# Altium PCB InfoDisplayPreReRoute.PcbDoc (part 1 of 2)
Units mil, origin at the board's own origin, x right, y up, seen from the top; angles counter-clockwise.
Board outline 4606.3 x 1732.28 mil, 2 copper layers (Top Layer, Bottom Layer), stack 65.792 mil thick; 218 components, 174 nets, 682 pads, 190 vias.
Unrouted connection lines stored in the file: 55.
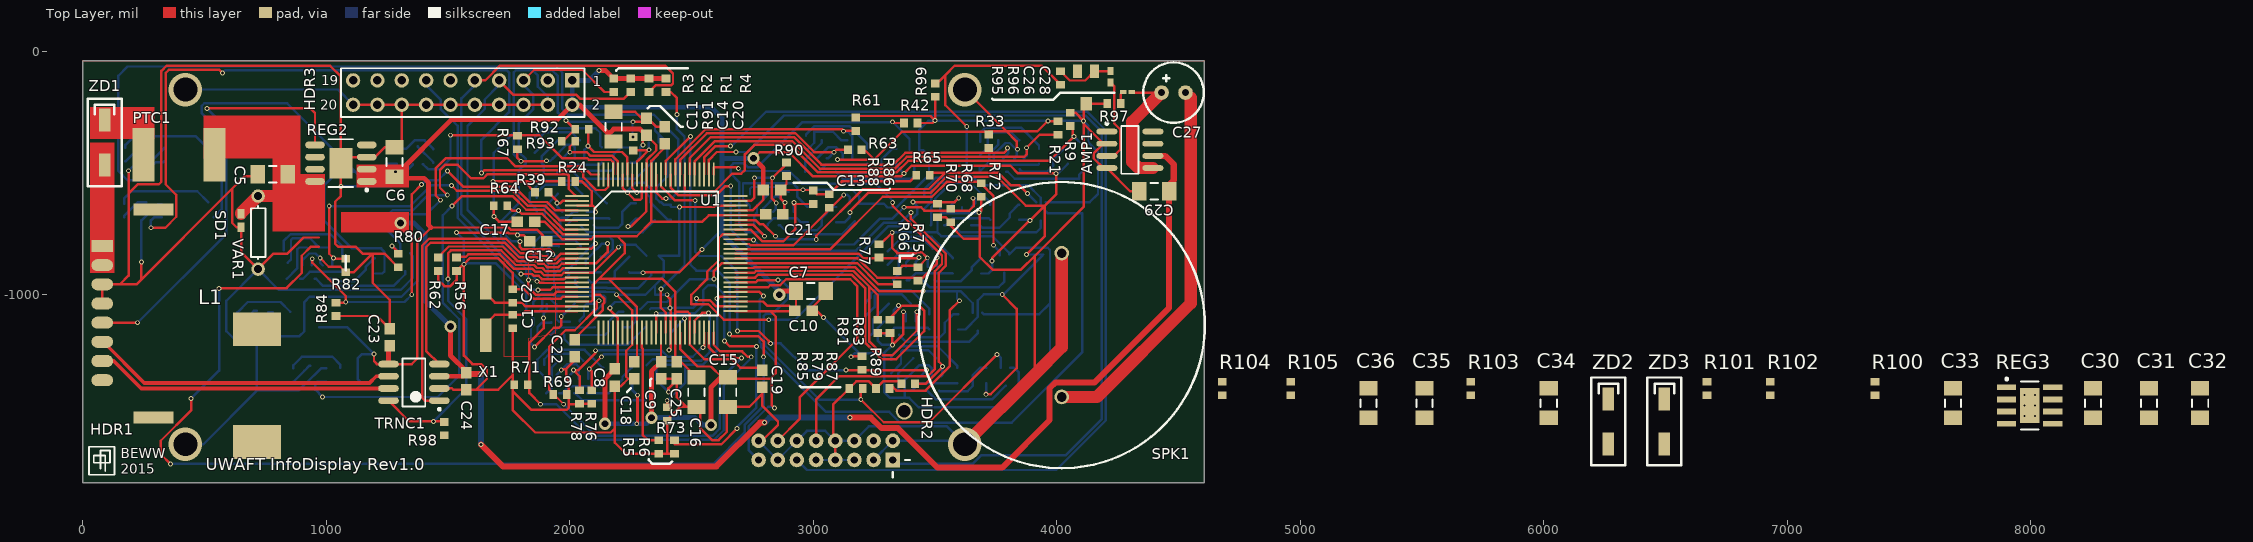
[diagram p0: Top Layer view]
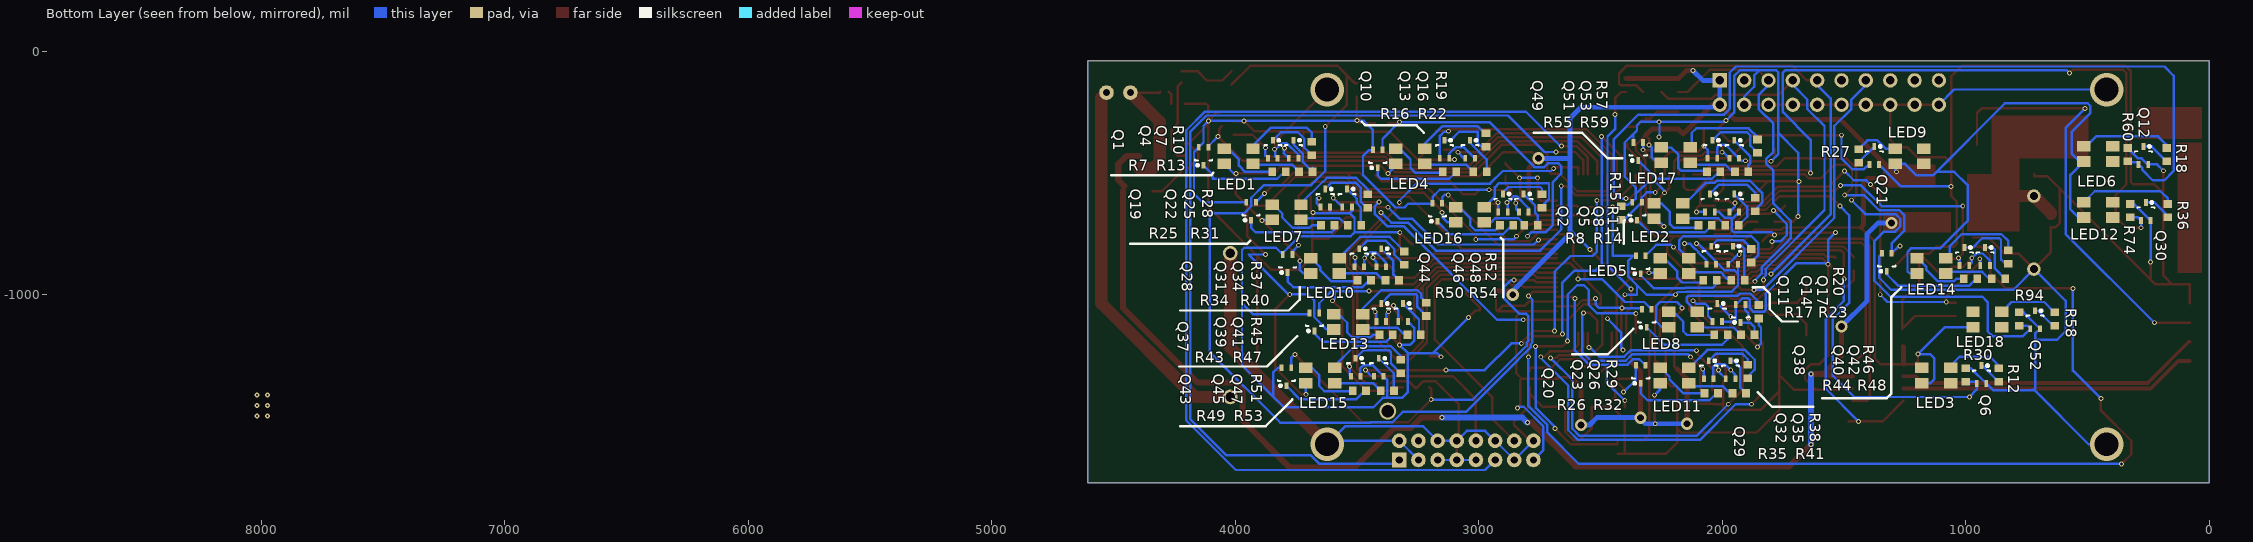
[diagram p1: Bottom Layer view, seen from below]

## Layer stack, top to bottom
Top Solder: solder mask 0.4, Solder Resist, Dk 3.5
Top Layer: signal copper 1.4
Dielectric 1: dielectric 62.9921, FR-4, Dk 4.8
Bottom Layer: signal copper 1.4
Bottom Solder: solder mask 0.4, Solder Resist, Dk 3.5

## Board outline
0,-39.37 4606.3,-39.37 4606.3,-1771.65 0,-1771.65

## Design rules (kind name [scope] priority, off if disabled: settings)
Clearance [All] p1: gap=6
DiffPairsRouting [All] p1: maxlimit=10 minlimit=10 mostfreqgap=10 toplayer_minwidth=15 toplayer_maxwidth=15 toplayer_prefwidth=15 bottomlayer_minwidth=15 bottomlayer_maxwidth=15 bottomlayer_prefwidth=15 maxuncoupledlength=500
MinimumSolderMaskSliver MinimumSolderMaskSliver_SAM [HasFootprint('100-LQFP')] p1: minsoldermaskwidth=3
MinimumSolderMaskSliver [All] p2: minsoldermaskwidth=4
PolygonConnect [All] p1: connectstyle=Direct reliefconductorwidth=10 reliefentries=4 polygonreliefangle="90 Angle" airgapwidth=10
RoutingVias [All] p1: holewidth=10 width=20 viastyle="Through Hole" minholewidth=12 minwidth=20 maxholewidth=500 maxwidth=450
SilkToSilkClearance [All and not HasFootprint('SOT50P160X110-3N')] p1: silktosilkclearance=4
SilkToSolderMaskClearance [IsPad and not HasFootprint('SOT50P160X110-3N')] p1: minsilkscreentomaskgap=4 clearancetoexposedcopper=TRUE
SolderMaskExpansion [All] p1: expansion=4
Width [All] p1: maxlimit=100 minlimit=10 preferedwidth=10
25 further rules are at their usual default settings.

## Classes and differential pairs
component class InfoDisplayAudio: AMP1 C26 C27 C28 C29 R95 R96 R97 SPK1
component class InfoDisplayLEDs: LED1 LED2 LED3 LED4 LED5 LED6 LED7 LED8 LED9 LED10 LED11 LED12 LED13 LED14 LED15 LED16 LED17 LED18 Q1 Q2 Q4 Q5 Q6 Q7 Q8 Q10 Q11 Q12 Q13 Q14 Q16 Q17 Q19 Q20 Q21 Q22 Q23 Q25 Q26 Q28 Q29 Q30 Q31 Q32 Q34 Q35 Q37 Q38 Q39 Q40 Q41 Q42 Q43 Q44 Q45 Q46 Q47 Q48 Q49 Q51 Q52 Q53 R7 R8 R9 R10 R11 R12 R13 R14 R15 R16 R17 R18 R19 R20 R21 R22 R23 R24 R25 R26 R27 R28 R29 R30 R31 R32 R33 R34 R35 R36 R37 R38 R39 R40 R41 R42 R43 R44 R45 R46 R47 R48 R49 R50 R51 R52 R53 R54 R55 R56 R57 R58 R59 R60 R61 R62 R63 R64 R65 R66 R67 R68 R69 R70 R71 R72 R73 R74 R75 R76 R77 R78 R79 R80 R81 R82 R83 R84 R85 R86 R87 R88 R89 R90 R91 R92 R93 R94
component class InfoDisplay: C1 C2 C7 C8 C9 C10 C11 C12 C13 C14 C15 C16 C17 C18 C19 C20 C21 C22 C23 C24 C25 HDR1 HDR2 HDR3 R1 R2 R3 R4 R5 R6 R98 R99 TRNC1 U1 X1
component class InfoDisplayPower: C5 C6 C30 C31 C32 C33 C34 C35 C36 L1 PTC1 R100 R101 R102 R103 R104 R105 REG2 REG3 SD1 VAR1 ZD1 ZD2 ZD3
differential pair CAR_CAN: +CAR_CAN_P -CAR_CAN_N

## Components (designator, comment, footprint, x,y, rotation, side; value= is the part's Value field where it differs from the comment)
AMP1 "LM386MX" SOIC127P600X173-8N 4300,-405 r0 top
C1 "CL10C300FB8NNNC" 1608[0603] 1765,-1110 r90 top
C2 "Cap" 1608[0603] 1765,-1005 r270 top
C5 "CGA5L1X7R1E106K160AC" CAPC3216M 780,-505 r0 top
C6 "CGA5L1X7R1E106K160AC" CAPC3216M 1280,-455 r90 top
C7 "Cap Pol1" CAPC3216M 2990,-985 r0 top
C8 "Cap" CAPC1608M 2185,-1340 r270 top
C9 "Cap" CAPC1608M 2375,-1310 r270 top
C10 "Cap" CAPC1608M 2960,-1065 r0 top
C11 "Cap Pol1" CAPC3216M 2180,-310 r90 top
C12 "Cap" CAPC1608M 1870,-780 r180 top
C13 "Cap" CAPC1608M 2830,-570 r0 top
C14 "Cap" CAPC1608M 2315,-310 r90 top
C15 "Cap Pol1" CAPC3216M 2650,-1400 r270 top
C16 "Cap Pol1" CAPC3216M 2520,-1400 r270 top
C17 "Cap" CAPC1608M 1820,-700 r180 top
C18 "Cap" CAPC1608M 2265,-1310 r270 top
C19 "Cap" CAPC1608M 2790,-1345 r270 top
C20 "Cap" CAPC1608M 2390,-345 r90 top
C21 "Cap" CAPC1608M 2840,-670 r0 top
C22 "Cap" CAPC1608M 2020,-1220 r270 top
C23 "Cap" CAPC1608M 1260,-1175 r270 top
C24 "Cap" CAPC1608M 1575,-1355 r270 top
C25 "Cap" CAPC1608M 2440,-1310 r270 top
C26 "GRM155R60J105KE19D" CAPC1005N 4220,-105 r270 top
C27 "EEU-FR1A271" EEU-FR1A271 4430,-170 r0 top
C28 "GRM033R61E472KA12D" RESC0603N 4290,-167.28 r0 top
C29 "F930J107MAA" CAPC3216M 4400,-575 r180 top
C30 "CGA5L1X7R1E106K160AC" CAPC3216M 8255,-1445 r90 top
C31 "CGA5L1X7R1E106K160AC" CAPC3216M 8485,-1445 r90 top
C32 "CGA5L1X7R1E106K160AC" CAPC3216M 8695,-1445 r90 top
C33 "CGA5L1X7R1E106K160AC" CAPC3216M 7680,-1445 r90 top
C34 "CGA5L1X7R1E106K160AC" CAPC3216M 6020,-1445 r90 top
C35 "CGA5L1X7R1E106K160AC" CAPC3216M 5510,-1445 r90 top
C36 "CGA5L1X7R1E106K160AC" CAPC3216M 5280,-1445 r90 top
HDR1 "Vehicle" Molex_DuraClick_8Pin_Vertical 80,-800 r270 top
HDR2 "Display" Molex_iGrid_16Pin_Vertical_Alt 3090,-1600 r180 top
HDR3 "JTAG" HDR2X10 2010,-120 r180 top
L1 "SRP1265A-220M" SRP1265A-220M 715,-1605 r90 top
LED1 "LED" CLVBA-FKA-CAEDH8BBB7A363CT-ND 4045,-400 r180 bottom
LED2 "LED" CLVBA-FKA-CAEDH8BBB7A363CT-ND 2280,-625 r180 bottom
LED3 "LED" CLVBA-FKA-CAEDH8BBB7A363CT-ND 1180,-1300 r180 bottom
LED4 "LED" CLVBA-FKA-CAEDH8BBB7A363CT-ND 3340,-400 r180 bottom
LED5 "LED" CLVBA-FKA-CAEDH8BBB7A363CT-ND 2255,-850 r180 bottom
LED6 "LED" CLVBA-FKA-CAEDH8BBB7A363CT-ND 515,-390 r180 bottom
LED7 "LED" CLVBA-FKA-CAEDH8BBB7A363CT-ND 3847.94,-629.94 r180 bottom
LED8 "LED" CLVBA-FKA-CAEDH8BBB7A363CT-ND 2220,-1070 r180 bottom
LED9 "LED" CLVBA-FKA-CAEDH8BBB7A363CT-ND 1290,-400 r180 bottom
LED10 "LED" CLVBA-FKA-CAEDH8BBB7A363CT-ND 3690,-850 r180 bottom
LED11 "LED" CLVBA-FKA-CAEDH8BBB7A363CT-ND 2255,-1300 r180 bottom
LED12 "LED" CLVBA-FKA-CAEDH8BBB7A363CT-ND 515,-620 r180 bottom
LED13 "LED" CLVBA-FKA-CAEDH8BBB7A363CT-ND 3595,-1080 r180 bottom
LED14 "LED" CLVBA-FKA-CAEDH8BBB7A363CT-ND 1200,-850 r180 bottom
LED15 "LED" CLVBA-FKA-CAEDH8BBB7A363CT-ND 3710,-1300 r180 bottom
LED16 "LED" CLVBA-FKA-CAEDH8BBB7A363CT-ND 3095,-640 r180 bottom
LED17 "LED" CLVBA-FKA-CAEDH8BBB7A363CT-ND 2250,-395.43 r180 bottom
LED18 "LED" CLVBA-FKA-CAEDH8BBB7A363CT-ND 970,-1070 r180 bottom
PTC1 "0ZCF0200AF2C" 0ZCF0200AF2C 250,-425 r0 top
Q1 "MOSFET-N" SOT50P160X110-3N 4110,-395 r270 bottom
Q2 "MOSFET-N" SOT50P160X110-3N 2330,-620 r270 bottom
Q4 "MOSFET-N" SOT50P160X110-3N 3865,-440 r90 bottom
Q5 "MOSFET-N" SOT50P160X110-3N 2070,-660 r90 bottom
Q6 "MOSFET-N" SOT50P160X110-3N 955,-1365 r90 bottom
Q7 "MOSFET-N" SOT50P160X110-3N 3780,-440 r90 bottom
Q8 "MOSFET-N" SOT50P160X110-3N 1970,-660 r90 bottom
Q10 "MOSFET-N" SOT50P160X110-3N 3395,-405 r270 bottom
Q11 "MOSFET-N" SOT50P160X110-3N 2315,-840 r270 bottom
Q12 "MOSFET-N" SOT50P160X110-3N 290,-465 r90 bottom
Q13 "MOSFET-N" SOT50P160X110-3N 3160,-440 r90 bottom
Q14 "MOSFET-N" SOT50P160X110-3N 2065,-875 r90 bottom
Q16 "MOSFET-N" SOT50P160X110-3N 3055,-440 r90 bottom
Q17 "MOSFET-N" SOT50P160X110-3N 1975,-875 r90 bottom
Q19 "MOSFET-N" SOT50P160X110-3N 3915,-620 r270 bottom
Q20 "MOSFET-N" SOT50P160X110-3N 2290,-1060 r270 bottom
Q21 "MOSFET-N" SOT50P160X110-3N 1395,-465 r90 bottom
Q22 "MOSFET-N" SOT50P160X110-3N 3650,-640 r90 bottom
Q23 "MOSFET-N" SOT50P160X110-3N 2040,-1110 r90 bottom
Q25 "MOSFET-N" SOT50P160X110-3N 3560,-640 r90 bottom
Q26 "MOSFET-N" SOT50P160X110-3N 1905,-1040 r270 bottom
Q28 "MOSFET-N" SOT50P160X110-3N 3765,-835 r270 bottom
Q29 "MOSFET-N" SOT50P160X110-3N 2315,-1290 r270 bottom
Q30 "MOSFET-N" SOT50P160X110-3N 280,-695 r90 bottom
Q31 "MOSFET-N" SOT50P160X110-3N 3510,-885 r90 bottom
Q32 "MOSFET-N" SOT50P160X110-3N 2075,-1345 r90 bottom
Q34 "MOSFET-N" SOT50P160X110-3N 3420,-885 r90 bottom
Q35 "MOSFET-N" SOT50P160X110-3N 1985.3,-1345 r90 bottom
Q37 "MOSFET-N" SOT50P160X110-3N 3655,-1075 r270 bottom
Q38 "MOSFET-N" SOT50P160X110-3N 1304.37,-830 r270 bottom
Q39 "MOSFET-N" SOT50P160X110-3N 3420,-1110 r90 bottom
Q40 "MOSFET-N" SOT50P160X110-3N 1025,-880 r90 bottom
Q41 "MOSFET-N" SOT50P160X110-3N 3330,-1110 r90 bottom
Q42 "MOSFET-N" SOT50P160X110-3N 940,-880 r90 bottom
Q43 "MOSFET-N" SOT50P160X110-3N 3770,-1300 r270 bottom
Q44 "MOSFET-N" SOT50P160X110-3N 3150,-625 r270 bottom
Q45 "MOSFET-N" SOT50P160X110-3N 3525,-1335 r90 bottom
Q46 "MOSFET-N" SOT50P160X110-3N 2920,-660 r90 bottom
Q47 "MOSFET-N" SOT50P160X110-3N 3430,-1335 r90 bottom
Q48 "MOSFET-N" SOT50P160X110-3N 2835,-660 r90 bottom
Q49 "MOSFET-N" SOT50P160X110-3N 2325,-375 r270 bottom
Q51 "MOSFET-N" SOT50P160X110-3N 2060,-440 r90 bottom
Q52 "MOSFET-N" SOT50P160X110-3N 734.69,-1139.69 r90 bottom
Q53 "MOSFET-N" SOT50P160X110-3N 1970,-440 r90 bottom
R1 "Res2" 1608[0603] 2325,-140 r90 top
R2 "Res2" 1608[0603] 2250,-140 r90 top
R3 "Res2" 1608[0603] 2180,-140 r90 top
R4 "Res2" 1608[0603] 2395,-140 r90 top
R5 "Res2" 1608[0603] 2365,-1625 r90 top
R6 "Res2" 1608[0603] 2430,-1625 r90 top
R7 "Res2" 1608[0603] 3820,-495 r0 bottom
R8 "Res2" 1608[0603] 2070,-715 r0 bottom
R9 "311-10KGRCT-ND" 1608[0603] 4055,-280 r90 top
R10 "Res2" 1608[0603] 3685,-400 r90 bottom
R11 "Res2" 1608[0603] 1865,-630 r270 bottom
R12 "Res2" 1608[0603] 865,-1330 r90 bottom
R13 "Res2" 1608[0603] 3710,-495 r0 bottom
R14 "Res2" 1608[0603] 1960,-715 r0 bottom
R15 "311-10KGRCT-ND" 1608[0603] 2415,-665 r90 bottom
R16 "Res2" 1608[0603] 3120,-495 r0 bottom
R17 "Res2" 1608[0603] 2050,-940 r0 bottom
R18 "Res2" 1608[0603] 175,-425 r90 bottom
R19 "Res2" 1608[0603] 2970,-365 r90 bottom
R20 "Res2" 1608[0603] 1880,-840 r270 bottom
R21 "311-10KGRCT-ND" 1608[0603] 4005,-315 r90 top
R22 "Res2" 1608[0603] 2995,-495 r0 bottom
R23 "Res2" 1608[0603] 1935,-940 r0 bottom
R24 "311-10KGRCT-ND" 1608[0603] 1995,-535 r180 top
R25 "Res2" 1608[0603] 3620,-715 r0 bottom
R26 "Res2" 1608[0603] 2005,-1165 r0 bottom
R27 "Res2" 1608[0603] 1440,-430 r90 bottom
R28 "Res2" 1608[0603] 3455,-615 r90 bottom
R29 "Res2" 1608[0603] 1850,-1070 r90 bottom
R30 "311-10KGRCT-ND" 1608[0603] 1000,-1330 r270 bottom
R31 "Res2" 1608[0603] 3510,-715 r0 bottom
R32 "Res2" 1608[0603] 1895,-1165 r0 bottom
R33 "311-10KGRCT-ND" 1608[0603] 3720,-370 r90 top
R34 "Res2" 1608[0603] 3470,-940 r0 bottom
R35 "Res2" 1608[0603] 2045,-1405 r0 bottom
R36 "Res2" 1608[0603] 170,-655 r90 bottom
R37 "Res2" 1608[0603] 3305,-850 r90 bottom
R38 "Res2" 1608[0603] 1895,-1315 r270 bottom
R39 "311-10KGRCT-ND" 1608[0603] 1885,-580 r180 top
R40 "Res2" 1608[0603] 3355,-940 r0 bottom
R41 "Res2" 1608[0603] 1930,-1405 r0 bottom
R42 "311-10KGRCT-ND" 1608[0603] 3400,-295 r0 top
R43 "Res2" 1608[0603] 3380,-1165 r0 bottom
R44 "Res2" 1608[0603] 980,-935 r0 bottom
R45 "Res2" 1608[0603] 3215,-1060 r90 bottom
R46 "Res2" 1608[0603] 825,-845 r90 bottom
R47 "Res2" 1608[0603] 3265,-1165 r0 bottom
R48 "Res2" 1608[0603] 865,-935 r0 bottom
R49 "Res2" 1608[0603] 3490,-1395 r0 bottom
R50 "Res2" 1608[0603] 2885,-715 r0 bottom
R51 "Res2" 1608[0603] 3320,-1295 r90 bottom
R52 "Res2" 1608[0603] 2740,-615 r270 bottom
R53 "Res2" 1608[0603] 3375,-1395 r0 bottom
R54 "Res2" 1608[0603] 2785,-715 r0 bottom
R55 "Res2" 1608[0603] 2035,-495 r0 bottom
R56 "311-10KGRCT-ND" 1608[0603] 1535,-875 r270 top
R57 "Res2" 1608[0603] 1855,-390 r90 bottom
R58 "Res2" 1608[0603] 635,-1100 r90 bottom
R59 "Res2" 1608[0603] 1920,-495 r0 bottom
R60 "311-10KGRCT-ND" 1608[0603] 335,-425 r90 bottom
R61 "311-10KGRCT-ND" 1608[0603] 3175,-300 r90 top
R62 "311-10KGRCT-ND" 1608[0603] 1460,-875 r270 top
R63 "311-10KGRCT-ND" 1608[0603] 3170,-405 r0 top
R64 "311-10KGRCT-ND" 1608[0603] 1715,-635 r180 top
R65 "311-10KGRCT-ND" 1608[0603] 3450,-510 r180 top
R66 "311-10KGRCT-ND" 1608[0603] 3345,-930 r90 top
R67 "311-10KGRCT-ND" 1608[0603] 1785,-375 r270 top
R68 "311-10KGRCT-ND" 1608[0603] 3565,-675 r270 top
R69 "311-10KGRCT-ND" 1608[0603] 1960,-1410 r0 top
R70 "311-10KGRCT-ND" 1608[0603] 3510,-654.68 r270 top
R71 "311-10KGRCT-ND" 1608[0603] 1800,-1370 r180 top
R72 "311-10KGRCT-ND" 1608[0603] 3690,-570 r270 top
R73 "311-10KGRCT-ND" 1608[0603] 2400,-1490 r270 top
R74 "311-10KGRCT-ND" 1608[0603] 325,-655 r90 bottom
R75 "311-10KGRCT-ND" 1608[0603] 3430,-915 r90 top
R76 "311-10KGRCT-ND" 1608[0603] 2090,-1420 r270 top
R77 "311-10KGRCT-ND" 1608[0603] 3270,-820 r90 top
R78 "311-10KGRCT-ND" 1608[0603] 2040,-1420 r270 top
R79 "311-10KGRCT-ND" 1608[0603] 3285,-1385 r180 top
R80 "311-10KGRCT-ND" 1608[0603] 1295,-860 r270 top
R81 "311-10KGRCT-ND" 1608[0603] 3265,-1130 r270 top
R82 "311-10KGRCT-ND" 1608[0603] 1080,-880 r270 top
R83 "311-10KGRCT-ND" 1608[0603] 3315,-1130 r270 top
R84 "311-10KGRCT-ND" 1608[0603] 1040,-1060 r270 top
R85 "311-10KGRCT-ND" 1608[0603] 3175,-1385 r180 top
R86 "311-10KGRCT-ND" 1608[0603] 3065,-615 r90 top
R87 "311-10KGRCT-ND" 1608[0603] 3390,-1365 r180 top
R88 "311-10KGRCT-ND" 1608[0603] 3000,-600 r90 top
R89 "311-10KGRCT-ND" 1608[0603] 3200,-1280 r90 top
R90 "311-10KGRCT-ND" 1608[0603] 2890,-485 r270 top
R91 "311-10KGRCT-ND" 1608[0603] 2260,-380 r90 top
R92 "311-10KGRCT-ND" 1608[0603] 2050,-320 r180 top
R93 "311-10KGRCT-ND" 1608[0603] 1995,-370 r180 top
R94 "311-10KGRCT-ND" 1608[0603] 780,-1100 r270 bottom
R95 "RC0603FR-07422KL" 1608[0603] 4015,-110 r270 top
R96 "PVZ3A103C01R00" PVZ3A103C01R00 4120,-200 r180 top
R97 "Res2" 1608[0603] 4235,-215 r180 top
R98 "311-10KGRCT-ND" 1608[0603] 1485,-1550 r90 top
R99 "311-10KGRCT-ND" 1608[0603] 3500,-160 r90 top
R100 "RC0603FR-07422KL" 1608[0603] 7360,-1385 r90 top
R101 "RC0603FR-07422KL" 1608[0603] 6670,-1385 r90 top
R102 "RC0603FR-07422KL" 1608[0603] 6930,-1385 r90 top
R103 "RC0603FR-07422KL" 1608[0603] 5700,-1385 r90 top
R104 "RC0603FR-07422KL" 1608[0603] 4680,-1385 r90 top
R105 "RC0603FR-07422KL" 1608[0603] 4960,-1385 r90 top
REG2 "BD33GC0MEFJ-ME2CT-ND" TSOP127P600X100_HS-9M 1060,-460 r180 top
REG3 "AOZ1284PI" SOIC127P600X170_HS-9N 7995,-1455 r0 top
SD1 "UCLAMP1211P.TCT" CAPC1005M 650,-695 r90 top
SPK1 "PUI AST-03008MR-R" AST-03008MR-R 4020,-1420 r90 top
TRNC1 "ATA6561" SOP127P600X165-8M 1360,-1360 r180 top
U1 "ATSAM3X8C" 100-LQFP 2030,-595 r0 top
VAR1 "V10P14AUTO" AXIAL-0.3 720,-745 r90 top
X1 "12MHz" XTAL 1655,-950 r270 top
ZD1 "DB2430100L" DB2430100L 90,-375 r90 top
ZD2 "1N4728A" DB2430100L 6265,-1520 r90 top
ZD3 "1N4728A" DB2430100L 6495,-1520 r90 top

## Footprints (in the part's own frame and the unit in brackets; to place one, negate y for a bottom-side part, rotate by r counter-clockwise, add the part's x,y. Pads: shape width x height; smd on the part's side, far side on the other; paste and mask are expansions set on the pad)
0ZCF0200AF2C [mm]
  rect 2.3x5.6 smd: 1(0,0) 2(7.4,0)
  body extent -0.1,-2.7 7.7,2.7, height 2.6
100-LQFP [mm] "Atmel SAM 3X8CA-AU"
  oval 2.5x0.2 smd: 1(0,0)
  rect 2.5x0.2 smd: 2(0,-0.5) 3(0,-1) 4(0,-1.5) 5(0,-2) 6(0,-2.5) 7(0,-3) 8(0,-3.5) 9(0,-4) 10(0,-4.5) 11(0,-5) 12(0,-5.5) 13(0,-6) 14(0,-6.5) 15(0,-7) 16(0,-7.5) 17(0,-8) 18(0,-8.5) 19(0,-9) 20(0,-9.5) 21(0,-10) 22(0,-10.5) 23(0,-11) 24(0,-11.5) 25(0,-12) 51(16.5,-12) 52(16.5,-11.5) 53(16.5,-11) 54(16.5,-10.5) 55(16.5,-10) 56(16.5,-9.5) 57(16.5,-9) 58(16.5,-8.5) 59(16.5,-8) 60(16.5,-7.5) 61(16.5,-7) 62(16.5,-6.5) 63(16.5,-6) 64(16.5,-5.5) 65(16.5,-5) 66(16.5,-4.5) 67(16.5,-4) 68(16.5,-3.5) 69(16.5,-3) 70(16.5,-2.5) 71(16.5,-2) 72(16.5,-1.5) 73(16.5,-1) 74(16.5,-0.5) 75(16.5,0)
  rect 0.2x2.5 smd: 26(2.25,-14.25) 27(2.75,-14.25) 28(3.25,-14.25) 29(3.75,-14.25) 30(4.25,-14.25) 31(4.75,-14.25) 32(5.25,-14.25) 33(5.75,-14.25) 34(6.25,-14.25) 35(6.75,-14.25) 36(7.25,-14.25) 37(7.75,-14.25) 38(8.25,-14.25) 39(8.75,-14.25) 40(9.25,-14.25) 41(9.75,-14.25) 42(10.25,-14.25) 43(10.75,-14.25) 44(11.25,-14.25) 45(11.75,-14.25) 46(12.25,-14.25) 47(12.75,-14.25) 48(13.25,-14.25) 49(13.75,-14.25) 50(14.25,-14.25) 76(14.25,2.25) 77(13.75,2.25) 78(13.25,2.25) 79(12.75,2.25) 80(12.25,2.25) 81(11.75,2.25) 82(11.25,2.25) 83(10.75,2.25) 84(10.25,2.25) 85(9.75,2.25) 86(9.25,2.25) 87(8.75,2.25) 88(8.25,2.25) 89(7.75,2.25) 90(7.25,2.25) 91(6.75,2.25) 92(6.25,2.25) 93(5.75,2.25) 94(5.25,2.25) 95(4.75,2.25) 96(4.25,2.25) 97(3.75,2.25) 98(3.25,2.25) 99(2.75,2.25) 100(2.25,2.25)
  silkscreen extent 1.79,-12.46 14.71,0.47, body extent 1.4,-12.95 15.11,0.89, height 1.6
1608[0603] [mm] "Chip Capacitor, Body 1.6x0.8mm, IPC High Density"
  rect 0.8x0.9 smd: 1(-0.7,0) 2(0.7,0)
  body extent -0.87,-0.48 0.87,0.48, height 1.3
AST-03008MR-R [mil] "PUI 0.15W Speaker"
  round 60 hole 39.37: 1(0,0) 2(590.55,0)
  silkscreen extent -292,-588 883,588, body extent -288,-586 883,586, height 492
AXIAL-0.3 [mm] "Axial Device, Thru-Hole; 2 Leads; 0.3 in Pin Spacing"
  round 1.4 hole 0.85: 1(-3.81,0) 2(3.81,0)
  silkscreen extent -2.77,-0.76 2.77,0.76
CAPC1005M [mm] "Chip Capacitor, Body 1.0x0.5mm, IPC Low Density"
  rect 1x0.7 smd: 1(-0.7,0) 2(0.7,0)
  body extent -0.55,-0.3 0.55,0.3, height 0.6
CAPC1005N [mm] "Chip Capacitor, Body 1.0x0.5mm, IPC Medium Density"
  rect 0.8x0.6 smd: 1(-0.6,0) 2(0.6,0)
  body extent -0.55,-0.3 0.55,0.3, height 0.6
CAPC1608M [mm] "Chip Capacitor, Body 1.6x0.8mm, IPC Low Density"
  rect 1.2x1.1 smd: 1(-0.9,0) 2(0.9,0)
  body extent -0.87,-0.48 0.87,0.48, height 0.85
CAPC3216M [mm] "Chip Capacitor, Body 3.2x1.6mm, IPC Low Density"
  rect 1.5x1.9 smd: 1(-1.55,0) 2(1.55,0)
  silkscreen extent -0.4,-0.85 0.4,0.85, body extent -1.7,-0.9 1.7,0.9, height 1.35
CLVBA-FKA-CAEDH8BBB7A363CT-ND [mm] "3 Colour LED"
  rect 1.4x1.1 smd: 1(0,0) 2(0,-1.6) 3(3,-1.6) 4(3,0)
  body extent -0.13,-2.41 3.17,0.76, height 2.1
DB2430100L [mm] "DB24301"
  rect 2.4x1.2 smd: A(-2.35,0) K(2.35,0)
  silkscreen extent -4.57,-1.78 4.57,1.78, body extent -2.36,-0.71 2.34,0.71, height 0.85
EEU-FR1A271 [mil] "Panasonic 270uF Capacitor, Radial"
  round 60 hole 30: 1(0,0) 2(98.43,0)
  silkscreen extent -75,-124 173,124, body extent -72,-128 175,120, height 504
HDR2X10 [mm] "Connector; Header; 10x2 Position"
  rect 1.5x1.5 hole 0.9: 1(0,0)
  round 1.5 hole 0.9: 2(0,2.54) 3(2.54,0) 4(2.54,2.54) 5(5.08,0) 6(5.08,2.54) 7(7.62,0) 8(7.62,2.54) 9(10.16,0) 10(10.16,2.54) 11(12.7,0) 12(12.7,2.54) 13(15.24,0) 14(15.24,2.54) 15(17.78,0) 16(17.78,2.54) 17(20.32,0) 18(20.32,2.54) 19(22.86,0) 20(22.86,2.54)
  silkscreen extent -1.27,-1.27 24.13,3.81
Molex_DuraClick_8Pin_Vertical [mm]
  rect 1.25x2.25 smd: A1(0,0)
  oval 1.25x2.25 smd: A2(2,0) A3(4,0) A4(6,0) A5(8,0) A6(10,0) A7(12,0) A8(14,0)
  rect 1.25x4.2 smd: CHAS(-3.81,5.334) CHAS(17.907,5.334)
  body extent -4.31,-1.02 18.28,8.13, height 7.97
Molex_iGrid_16Pin_Vertical_Alt [mil] "2.00mm Pitch iGrid™ Wire-to-Board Header, Dual Row, Vertical, with PCB Locator, 16 Circuits, Lead-Free"
  rect 60x60 hole 30: 1(-236.22,78.74)
  round 60 hole 30: 2(-236.22,0) 3(-157.48,78.74) 4(-157.48,0) 5(-78.74,78.74) 6(-78.74,0) 7(0,78.74) 8(0,0) 9(78.74,78.74) 10(78.74,0) 11(157.48,78.74) 12(157.48,0) 13(236.22,78.74) 14(236.22,0) 15(314.96,78.74) 16(314.96,0)
  round 70 hole 51.18: CHAS(-283.46,-122.05)
  silkscreen extent -307,79 -236,150, body extent -315,-161 394,161, height 482
PVZ3A103C01R00 [mm] "Murata 10k Trimmer, 1 Turn"
  rect 0.95x1.4 smd: 1(-0.9,-3) 3(0.9,-3)
  rect 1.2x1.4 smd: 2(0,0.4)
  body extent -1.55,-3.2 1.55,0.4, height 1.86
RESC0603N [mm] "Chip Resistor, Body 0.6x0.3mm, IPC Medium Density"
  rect 0.7x0.4 smd: 1(-0.45,0) 2(0.45,0)
  body extent -0.32,-0.17 0.32,0.17, height 0.3
SOIC127P600X170_HS-9N [mm] "SOIC, 8-Leads, Body 4.90x3.90mm, Pitch 1.27mm, Thermal Pad 3.60.2x2.00.2mm, IPC Medium Density"
  rect 2x0.6 smd: 1(-2.4,1.905) 2(-2.4,0.635) 3(-2.4,-0.635) 4(-2.4,-1.905) 5(2.4,-1.905) 6(2.4,-0.635) 7(2.4,0.635) 8(2.4,1.905)
  rect 2x3.6 smd: 9(0,0)
  silkscreen extent -2.52,-2.5 0.9,2.88, body extent -2,-2.5 2,2.5, height 1.7
SOIC127P600X173-8N [mm] "SOIC, 8-Leads, Body 4.90x3.90mm, Pitch 1.27mm, IPC Medium Density"
  oval 2.2x0.6 smd: 1(-2.4,1.905) 2(-2.4,0.635) 3(-2.4,-0.635) 4(-2.4,-1.905) 5(2.4,-1.905) 6(2.4,-0.635) 7(2.4,0.635) 8(2.4,1.905)
  silkscreen extent -2.52,-2.5 0.9,2.88, body extent -2,-2.5 2,2.5, height 1.74
SOP127P600X165-8M [mm] "SOP, 8-Leads, Body 4.90x3.90mm, Pitch 1.27mm, IPC Low Density"
  oval 2.15x0.7 smd: 1(-2.65,1.905) 2(-2.65,0.635) 3(-2.65,-0.635) 4(-2.65,-1.905) 5(2.65,-1.905) 6(2.65,-0.635) 7(2.65,0.635) 8(2.65,1.905)
  silkscreen extent -2.78,-2.5 1.18,2.93, body extent -2,-2.5 2,2.5, height 1.65
SOT50P160X110-3N [mm] "SOT23, 3-Leads, Body 1.60x1.60mm, Pitch 0.50mm, IPC Medium Density"
  rect 0.7x0.4 smd: 1(1.875,-0.5) 2(0,0)
  rect 0.7x0.4 smd paste+0: 3(0,-1)
  silkscreen extent 1.27,-1.4 2,0.4, body extent 0.48,-1.4 1.37,0.4, height 1.1
SRP1265A-220M [mm] "Bourns 22uH Inductor"
  rect 3.5x5 smd: 1(0,0) 2(11.75,0)
  body extent -1.02,-6.35 12.7,6.35, height 6.2
TSOP127P600X100_HS-9M [mm] "TSOP, 8-Leads, Body 4.90x3.90mm, Pitch 1.27mm, Thermal Pad 3.20.2x2.40.2mm, IPC Low Density"
  oval 2.05x0.7 smd: 1(-2.7,1.905) 2(-2.7,0.635) 3(-2.7,-0.635) 4(-2.7,-1.905) 5(2.7,-1.905) 6(2.7,-0.635) 7(2.7,0.635) 8(2.7,1.905)
  rect 2.4x3.2 smd: 9(0,0)
  silkscreen extent -2.83,-2.5 1.27,2.93, body extent -2,-2.5 2,2.5, height 1
XTAL [mm]
  rect 3.5x1.2 smd: 1(0,0) 2(5.5,0)
  body extent -0.89,-2.03 6.35,2.03, height 2.3

## Part data
AMP1: "TI Audio Amplifier, 0.350W, 5-12V"
C1 C5 C6 C26 C28 C30 C31 C32 C33 C34 C35 C36: library part Cap, "Capacitor"
C2 C8 C9 C10 C12 C13 C14 C17 C18 C19 C20 C21 C22 C23 C24 C25: "Capacitor"
C7 C11 C15 C16: "Polarized Capactior"
C27 C29: library part "Cap Pol1", "Polarized Capactior"
HDR1: library part Molex_DuraClick_8Pin_Vertical, "Molex iClick Series Connector, 8 Pin"
HDR2: library part Molex_iGrid_16Pin_Vertical, "Molex iGrid Series Connector, 2 Row, 16 Pin"
HDR3: library part "Header 10X2", "JTAG Header, 10-Pin, Dual row, 2.56 pitch, Male"
L1: library part Inductor, "Inductor"
LED1: "LED RGB"
PTC1: "PTC device, 2A hold, 4A trip"
Q1 Q2 Q4 Q5 Q6 Q7 Q8 Q10 Q11 Q12 Q13 Q14 Q16 Q17 Q19 Q20 Q21 Q22 Q23 Q25 Q26 Q28 Q29 Q30 Q31 Q32 Q34 Q35 Q37 Q38 Q39 Q40 Q41 Q42 Q43 Q44 Q45 Q46 Q47 Q48 Q49 Q51 Q52 Q53: "N-Channel MOSFET"
R1 R2 R3 R4 R5 R6 R7 R8 R10 R11 R12 R13 R14 R16 R17 R18 R19 R20 R22 R23 R25 R26 R27 R28 R29 R31 R32 R34 R35 R36 R37 R38 R40 R41 R43 R44 R45 R46 R47 R48 R49 R50 R51 R52 R53 R54 R55 R57 R58 R59 R97: "Resistor"
R9 R15 R21 R24 R30 R33 R39 R42 R56 R60 R61 R62 R63 R64 R65 R66 R67 R68 R69 R70 R71 R72 R73 R74 R75 R76 R77 R78 R79 R80 R81 R82 R83 R84 R85 R86 R87 R88 R89 R90 R91 R92 R93 R94 R95 R98 R99 R100 R101 R102 R103 R104 R105: library part Res2, "Resistor"
R96: library part "Res Adj2", "Variable Resistor"
REG2: "Rohm 3.3V LDO"
REG3: "A&M 4A Buck Regulator, 0.8 to 30V"
SD1: library part UCLAMP0511PQTCT, "Semtech TVS Diode"
SPK1: "PUI 0.15W Speaker, 8 Ohm"
TRNC1: "Atmel CAN Transceiver"
U1: library part ATSAM3X8CA-AU, "Atmel SAM Series Microcontroller"
VAR1: library part "Res Varistor", "Varistor (Voltage-Sensitive Resistor)"
X1: library part XTAL, "12MHz Crystal Oscillator"
ZD1: "Panasonic Schottky Diode, 2A"
ZD2 ZD3: library part DB2430100L, "3.3V Zener Diode"

## Via types
v1: diameter 20, hole 12, Top Layer to Bottom Layer, 173 vias
v2: diameter 50, hole 28, Top Layer to Bottom Layer, 7 vias
v3: diameter 19.68, hole 7.87, Top Layer to Bottom Layer, 6 vias
v4: diameter 137.8, hole 98.43, Top Layer to Bottom Layer, 4 vias

## Nets (pads, with @x,y where several pads share a name; then routed paths per layer and width w, separated by ;. In a path a pad name is that pad's centre, name@x,y a point inside that pad or via, vN(x,y) a via of type N, cw(c..) or ccw(c..) an arc to the next point about the centre after c; other vN are vias at no path point)
3V3: C6.1 C7.1 C8.1 C9.1 C10.1 C11.1 C12.1 C13.1 C14.1 C15.1 C23.2 HDR2.15 HDR3.1 HDR3.2 R1.2 R2.2 R3.2 R4.2 REG2.1 REG2.2 TRNC1.5 U1.11 U1.30 U1.39 U1.43 U1.51 U1.53 U1.72 U1.90 | length 17753.5
  Top Layer w10: v1(1196.01,-1244) 1196.01,-1273.01 1208,-1285 TRNC1.5@1255.67,-1285 1351,-1285 1373,-1263 1373,-782 1430,-725 1431,-724 1747.73,-724 1756.39,-732.65 1865.12,-732.65 C12.1@1915.43,-782.96 ; C23.2@1255.67,-1214.76 1255.67,-1210.43 C23.2@1260,-1210.43 ; C12.1@1915.43,-790 1917.28,-791.85 U1.11@2030,-791.85 ; v1(2165,-1055) 2160.32,-1055 2158.32,-1057 2197.32,-1096 U1.30@2197.32,-1156.02 2197.32,-1292.24 C8.1@2185,-1304.57 ; v1(2238.5,-720) 2252,-720 2314,-658 2314,-560.43 2315.43,-559 U1.90@2315.43,-506.42 2315.43,-447.37 2355,-407.8 2355,-385.43 C14.1@2315,-345.43 ; v1(2300,-910) 2302.01,-907.99 2450.01,-907.99 v1(2543,-815) ; v1(2300,-385) 2300,-360.43 C14.1@2307.72,-352.72 ; U1.39@2374.49,-1156.02 2374.49,-1274.05 C9.1@2375,-1274.57 ; U1.43@2453.23,-1156.02 2453.23,-1223.23 2525,-1295 2580,-1295 2623.98,-1338.98 C15.1@2650,-1338.98 2675,-1338.98 2675,-1345 2823,-1345 ; U1.53@2679.61,-1028.07 2793.07,-1028.07 2810,-1045 2899.69,-1045 2922.13,-1067.44 U1.51@2679.61,-1067.44 2823.44,-1067.44 2846,-1090 2846,-1322 2823,-1345 ; U1.72@2679.61,-654.05 2750.95,-654.05 2794.57,-610.43 C13.1@2794.57,-570 ; v2(2755,-440) 2780,-415 2900,-415 2999,-514 3360,-514 v1(3372,-502) 3404,-470 3808.75,-470 3840.75,-502 v1(3997,-502) 3997,-588 v1(3890,-695) 3888,-695 3734,-849 v1(3734,-861) ; v1(2840,-1465) 2830,-1455 2830,-1352 2823,-1345 ; C10.1@2924.57,-1065 2928.98,-1060.59 C7.1@2928.98,-985 ; v1(3150.88,-663.07) 3150.88,-655.88 3224.76,-582 3480.63,-582 3546.93,-515.69 3753.69,-515.69 3873,-635 3951,-635 3951,-759 v1(3875,-835) ; v1(3708.73,-1409.01) 3708.73,-1402.27 3715.47,-1409.01 3727.99,-1409.01 3835,-1302 3835,-1058 v1(3776,-999)
  Top Layer w12: v1(2275,-1530) 2276,-1530 2278,-1528 v1(2278,-1412.72)
  Top Layer w20: TRNC1.5@1255.67,-1285 C23.2@1255.67,-1214.76 ; C6.1@1261.02,-530 C6.1@1280,-511.02 ; 1430,-725 1420,-715 1420,-540.23 1401.77,-522 1285.98,-522 C6.1@1280,-516.02 1516.02,-280 1950,-280 HDR3.2@2010,-220 2040,-220 2160,-340 2180,-320 2289.57,-320 C14.1@2315,-345.43 ; C12.1@1915.43,-790 C12.1@1915.43,-782.96 ; v1(2120,-80) 2147.56,-80 R3.2@2180,-112.44 R4.2@2395,-112.44 ; v2(2145,-1530) 2145,-1344.57 C8.1@2185,-1304.57 ; v2(2335,-1505) 2335,-1314.57 C9.1@2375,-1274.57 ; v2(2580,-1535) 2580,-1380 2621.02,-1338.98 C15.1@2623.98,-1338.98 ; v2(2755,-440) 2794.57,-479.57 C13.1@2794.57,-570 ; v2(2860,-1000) 2860,-985 C7.1@2928.98,-985
  Bottom Layer w10: 515,-452.99 570,-507.99 570,-650 537.01,-682.99 ; 532.01,-452.99 565,-420 565,-332 489,-256 489,-224 499,-214 839,-214 1135,-510 1201.99,-510 1249,-462.99 1290,-462.99 1290,-490 v1(1285,-495) ; 970,-1132.99 1085,-1132.99 v1(1196.01,-1244) 1146,-1244 1130,-1260 1130,-1347.99 1145,-1362.99 1175,-1362.99 ; 1120,-496 1047,-496 991,-552 991,-696 1105,-810 1225,-810 1239,-824 1239,-904 1230.01,-912.99 1200,-912.99 ; v1(2165,-1055) 2160.32,-1055 2185.32,-1030 2255,-1030 2270,-1045 2270,-1110.99 2248,-1132.99 2220,-1132.99 ; v1(2238.5,-720) 2237.99,-720 2270,-687.99 2284.01,-687.99 ; 2245,-907.99 2247.01,-910 v1(2300,-910) ; 2250,-458.43 2266.57,-458.43 2290,-435 2290,-395 v1(2300,-385) ; v1(2543,-815) 2623,-735 2625,-735 ; HDR2.15@2775.04,-1678.74 2734,-1637.7 2734,-1541 2815,-1460 2835,-1460 v1(2840,-1465) ; 3095,-702.99 3128.01,-702.99 3150,-681 3150,-663.95 v1(3150.88,-663.07) ; 3340,-462.99 3340,-470 v1(3372,-502) ; 3595,-1142.99 3624.22,-1142.99 3675.5,-1091.71 3675.5,-1023.5 3699.99,-999 3781,-999 3941,-839 ; 3690,-912.99 3720.01,-912.99 3734,-899 v1(3734,-861) ; v1(3708.73,-1409.01) 3710,-1407.74 3710,-1362.99 ; 3845,-692.99 v1@3885.99,-692.99 ; v1(3875,-835) 3945,-835 ; v1(3997,-502) 4005.99,-502 4045,-462.99
  Bottom Layer w12: 2255,-1362.99 2255,-1390 2277.72,-1412.72 v1(2278,-1412.72)
  Bottom Layer w20: v1(2120,-80) 2080,-120 HDR3.1@2010,-120 HDR3.2@2010,-220 2020,-230 2580,-230 2625,-275 2625,-440 ; v2(2145,-1530) 2315,-1530 2340,-1505 2515,-1505 2545,-1535 v2(2580,-1535) ; v2(2755,-440) 2625,-440 ; v2(2860,-1000) 2860,-985 2625,-750 2625,-440
5V0: AMP1.6 C5.2 C24.1 C29.1 C34.1 L1.2 LED1.2 LED2.2 LED3.2 LED4.2 LED5.2 LED6.2 LED7.2 LED8.2 LED9.2 LED10.2 LED11.2 LED12.2 LED13.2 LED14.2 LED15.2 LED16.2 LED17.2 LED18.2 R102.2 REG2.8 TRNC1.3 | length 5294.2
  Top Layer w10: C24.1@1559.57,-1335 1559.57,-1319.57 C24.1@1575,-1319.57
  Top Layer w20: TRNC1.3@1464.33,-1335 C24.1@1559.57,-1335 ; v2(1510,-1130) 1510,-1250 1575,-1315 C24.1@1575,-1319.57
  Top Layer w25: C24.1@1575,-1319.57 1580.43,-1325 v1(1635,-1325) ; v1(1635,-1615) 1725,-1705 2601.45,-1705 2781.45,-1525 v1(2800,-1525) ; v1(3150,-1505) 3236.77,-1505 3279.27,-1547.5 3347.5,-1547.5 3510,-1710 3775,-1710 3970,-1515 3970,-1385 3995,-1360 4155,-1360 4461.02,-1053.98 C29.1@4461.02,-575 ; AMP1.6@4394.49,-430 4445,-430 4480,-465 4480,-528.98 C29.1@4455,-553.98
  Bottom Layer w20: v2(1305,-705) 1360,-705 1405,-750 1405,-1025 v2(1510,-1130)
  Bottom Layer w25: v1(1635,-1615) v1(1635,-1325) ; v1(2800,-1525) 2820,-1505 v1(3150,-1505)
12V0: HDR1.A1 HDR1.A2 ZD1.A
12V0S: C30.1 C31.1 C32.1 PTC1.2 REG3.9 SD1.2 VAR1.2 | length 246.8
  Top Layer w50: SD1.2@650,-667.44 650,-665 VAR1.2@720,-595 830,-595 ; 841.02,-505 866.02,-530
  other v3: 7973.35,-1498.31 8016.65,-1498.31 7973.35,-1455 8016.65,-1455 7973.35,-1411.69 8016.65,-1411.69
CAN_RECEIVE: TRNC1.4 U1.14 | length 1174.7
  Top Layer w10: TRNC1.4@1464.33,-1285 1410,-1230.67 1410,-805 1429,-786 1731.51,-786 1791.51,-846 1866.21,-846 1877.21,-857 1899.67,-857 1914.67,-872 1945.33,-872 1965.33,-852 2028.9,-852 U1.14@2030,-850.9
CAN_TRANSCEIVERWAKE: R98.2 TRNC1.8 U1.16 | length 1613.8
  Top Layer w10: TRNC1.8@1255.67,-1435 1340.67,-1520 v1(1440,-1520) 1477.56,-1520 R98.2@1480,-1522.44 ; v1(1500,-935) 1500,-830 1512,-818 1718.25,-818 1778.25,-878 1852.95,-878 1865.23,-890.27 1887.69,-890.27 1901.42,-904 1958.58,-904 1972.31,-890.27 U1.16@2030,-890.27
  Bottom Layer w10: v1(1440,-1520) 1575,-1385 1575,-1100 1500,-1025 v1(1500,-935)
CAN_TRANSMIT: TRNC1.1 U1.13 | length 1394.2
  Top Layer w10: TRNC1.1@1464.33,-1435 1405,-1435 1394,-1424 1394,-798.37 1422.37,-770 1738.14,-770 1798.14,-830 1875,-830 1886,-841 1906.3,-841 1921.3,-856 1938.7,-856 1963.48,-831.22 U1.13@2030,-831.22
CAR_CAN_N: HDR1.A6 TRNC1.6 | length 1256.8
  Top Layer w15: HDR1.A6@80,-1193.7 84.06,-1193.7 252.68,-1362.32 1177.68,-1362.32 1205,-1335 TRNC1.6@1255.67,-1335
CAR_CAN_P: HDR1.A7 TRNC1.7 | length 1222.3
  Top Layer w15: HDR1.A7@80,-1272.44 127.44,-1272.44 240,-1385 TRNC1.7@1255.67,-1385
CAR_WAKESIGNAL: HDR1.A5 R100.2 | length 1792.1
  Top Layer w10: HDR1.A5@80,-1114.96 v1(225.04,-1114.96) ; v1(510,-235) 935,-235 953.7,-253.7 953.7,-385
  Bottom Layer w10: v1(225.04,-1114.96) 590,-750 590,-315 v1(510,-235)
GND: AMP1.2 AMP1.4 C1.1 C2.1 C5.1 C6.2 C7.2 C8.2 C9.2 C10.2 C11.2 C12.2 C13.2 C14.2 C15.2 C16.2 C17.2 C18.2 C19.2 C20.2 C21.2 C22.2 C23.1 C24.2 C25.2 C29.2 C30.2 C31.2 C32.2 C34.2 C36.2 HDR1.A3 HDR1.A4 HDR2.2 HDR2.3 HDR2.5 HDR2.6 HDR2.7 HDR2.8 HDR2.9 HDR2.12 HDR2.13 HDR2.16 HDR3.4 HDR3.6 HDR3.8 HDR3.10 HDR3.12 HDR3.14 HDR3.16 HDR3.18 HDR3.20 Q1.3 Q2.3 Q4.3 Q5.3 Q6.3 Q7.3 Q8.3 Q10.3 Q11.3 Q12.3 Q13.3 Q14.3 Q16.3 Q17.3 Q19.3 Q20.3 Q21.3 Q22.3 Q23.3 Q25.3 Q26.3 Q28.3 Q29.3 Q30.3 Q31.3 Q32.3 Q34.3 Q35.3 Q37.3 Q38.3 Q39.3 Q40.3 Q41.3 Q42.3 Q43.3 Q44.3 Q45.3 Q46.3 Q47.3 Q48.3 Q49.3 Q51.3 Q52.3 Q53.3 R5.1 R6.1 R9.2 R15.2 R21.2 R24.2 R30.1 R33.2 R39.2 R42.2 R56.2 R60.2 R61.2 R62.2 R63.2 R64.2 R65.2 R66.2 R67.2 R68.2 R69.2 R70.2 R71.2 R72.2 R73.2 R74.2 R75.2 R76.2 R77.2 R78.2 R79.2 R80.2 R81.2 R82.2 R83.2 R84.2 R85.2 R86.2 R87.2 R88.2 R89.2 R90.2 R91.2 R92.2 R93.2 R94.1 R96.2 R97.2 R98.1 R99.1 R101.1 R103.1 R104.1 R105.1 REG2.3 REG2.9 REG3.3 SD1.1 SPK1.2 TRNC1.2 U1.12 U1.22 U1.33 U1.41 U1.44 U1.52 U1.73 U1.91 U1.95 VAR1.1 ZD2.A ZD3.A | length 39881.1
  Top Layer w10: HDR1.A4@80,-1036.22 HDR1.A3@80,-957.48 152,-957.48 ; 188,-957.48 220.52,-957.48 ; v1(188,-491) 188,-584 ; v1(240.63,-865.48) 240.63,-937.37 220.52,-957.48 ; SD1.1@650,-722.56 SD1.1@650,-723 ; C5.1@718.98,-505 718.98,-513 665,-513 614,-564 ; 969.88,-765 906.02,-765 840,-831.02 783.98,-831.02 VAR1.1@720,-895 650,-825 SD1.1@650,-723 ; v1(975,-850) 1010,-885 1057.44,-885 R82.2@1080,-907.56 1113.46,-907.56 1190,-831.02 ; R84.2@1040,-1087.56 1207.99,-1087.56 C23.1@1260,-1139.57 1260,-1021 1190,-951 1190,-831.02 ; HDR3.20@1110,-220 HDR3.18@1210,-220 HDR3.16@1310,-220 ; R80.2@1295,-887.56 1238.47,-831.02 1190,-831.02 ; R62.2@1460,-902.56 1460,-940 1485,-965 1510,-965 1535,-940 R56.2@1535,-902.56 v1@1559.56,-878 ; TRNC1.2@1464.33,-1385 1516,-1385 1521.43,-1390.43 C24.2@1575,-1390.43 1705.57,-1390.43 1765,-1331 ; v1(1535,-745) 1746.11,-745 1749.76,-748.65 1779.65,-748.65 v1@1785,-754 ; 1614.57,-1390.43 1660,-1345 1660,-1310 1634.94,-1284.94 1599.94,-1284.94 1565,-1250 v1(1565,-875) 1590,-850 1705,-850 1765,-910 C2.1@1765,-977.44 1812.44,-977.44 1852,-1017 1962,-1017 1970.62,-1008.38 U1.22@2030,-1008.38 ; v1(1685,-535) 1800,-535 1815,-535 ; R64.2@1687.44,-635 1687.44,-678.44 v1(1688,-679) 1709,-700 C17.2@1784.57,-700 ; C1.1@1765,-1137.56 1765,-1331 ; v1(1785,-755) 1809.57,-755 C12.2@1834.57,-780 ; R67.2@1785,-402.56 1785,-438 v1(1799,-452) 1903,-452 v1(1905,-450) ; R39.2@1857.44,-580 1815,-537.56 1815,-535 ; HDR3.4@1910,-220 HDR3.6@1810,-220 HDR3.8@1710,-220 HDR3.10@1610,-220 HDR3.12@1510,-220 HDR3.14@1410,-220 HDR3.16@1310,-220 ; v1(1965,-1310) 1969.7,-1305.3 1985,-1305.3 ; R24.2@1967.44,-535 1815,-535 ; R93.2@1967.44,-370 1972.44,-370 R92.2@2022.44,-320 2020,-320 v1(1985,-285) ; C22.2@2020,-1240.43 2020,-1270.3 1985,-1305.3 ; U1.12@2030,-811.53 2088.47,-811.53 2105,-795 v1(2105,-790) ; R76.2@2090,-1447.56 R78.2@2040,-1447.56 2037.56,-1450 1996,-1450 ; C11.2@2180,-248.98 2267.98,-248.98 2296,-277 C14.2@2312.57,-277 ; v1(2192,-1000) 2256.38,-1064.38 U1.33@2256.38,-1156.02 2256.38,-1205.62 2232,-1230 2232,-1337.43 2240,-1345.43 ; U1.95@2217.01,-506.42 2217.01,-562.01 2265,-610 2290,-610 2296,-604 2296,-506.67 U1.91@2295.75,-506.42 ; R91.2@2257.44,-355 v1(2260,-352.44) ; v1(2260,-290) 2299.57,-290 C14.2@2312.57,-277 ; C18.2@2265,-1345.43 2240,-1345.43 ; C14.2@2315,-284.57 2329.57,-284.57 2354.57,-309.57 C20.2@2390,-309.57 ; C14.2@2315,-274.57 C14.2@2312.57,-277 ; C9.2@2375,-1345.43 C25.2@2440,-1345.43 C25.2@2440,-1350 ; v1(2400,-1000) 2395,-1000 2412,-1017 v1(2412,-1054) ; v1(2405,-1400) 2405,-1385 C25.2@2440,-1350 ; v1(2407.91,-1227.15) 2407.91,-1227.91 2410,-1230 2413.86,-1226.14 U1.41@2413.86,-1156.02 v1@2413.86,-1055.86 ; R6.1@2430,-1652.56 2401,-1652.56 ; v1(2450,-640) 2592.37,-640 2598,-634.37 U1.73@2679.61,-634.37 ; v1(2520,-1015) 2528,-1023 2575.63,-1023 2600.38,-1047.75 U1.52@2679.61,-1047.75 ; HDR2.16@2775.04,-1600 2790,-1600 2855,-1535 2855,-1520 2790,-1455 2790,-1408 ; C19.2@2790,-1380.43 2790,-1408 ; C13.2@2871,-570 2997.56,-570 R88.2@3000,-572.44 3015,-587.44 R86.2@3065,-587.44 3117.44,-535 3397.44,-535 R65.2@3422.44,-510 ; C21.2@2875.43,-670 2880,-665.43 2880,-620 2865.43,-605.43 C13.2@2865.43,-570 2890,-545.43 R90.2@2890,-512.56 ; v1(3042,-1094) 3013,-1065 C10.2@2995.43,-1065 2995.43,-1053 3051.02,-997.41 C7.2@3051.02,-985 ; HDR2.7@3090,-1678.74 HDR2.8@3090,-1600 3081,-1591 3081,-1451.44 R85.2@3147.44,-1385 3176.16,-1356.28 3228.72,-1356.28 R79.2@3257.44,-1385 3286.16,-1356.28 3353.72,-1356.28 R87.2@3362.44,-1365 ; v1(3100,-445) 3250,-445 ; v1(3155,-1255) 3157.56,-1252.44 R89.2@3200,-1252.44 ; R61.2@3175,-272.44 3181.16,-266.28 3481.28,-266.28 v1(3500,-285) ; R63.2@3197.56,-405 3210,-405 3250,-445 ; R81.2@3265,-1157.56 R83.2@3315,-1157.56 3325,-1167.56 v1(3325,-1206) 3370,-1161 v1(3370,-1070) ; R77.2@3270,-792.44 3275.56,-792.44 v1(3324,-744) 3324,-808 3345,-829 3421.65,-829 3425.03,-825.62 3445.23,-825.62 3460.5,-840.89 ; R66.2@3345,-902.44 3366,-881.44 3435.21,-881.44 v1(3468.13,-848.52) ; R42.2@3427.56,-295 3490,-295 v1(3500,-285) ; R99.1@3500,-187.56 v1(3500,-285) ; R70.2@3510,-682.24 3544.68,-682.24 R68.2@3565,-702.56 3565,-717.56 3617.44,-770 3683,-770 ; v4(3622.05,-157.48) 3793.57,-329 ; v1@3679.87,-664.79 3683,-667.92 3683,-770 ; v1@3680.66,-663.47 3690,-654.13 R72.2@3690,-597.56 ; R33.2@3720,-342.44 R33.2@3720,-329 ; v1(3839.06,-402.6) 3837.4,-402.6 3835,-405 3835,-370.43 3793.57,-329 ; 3910,-1326.22 3910,-840 ; R21.2@4005,-287.44 3964.44,-287.44 v1(3963,-286) 3920,-329 3793.57,-329 ; R9.2@4065,-252.44 4076.44,-252.44 v1(4110,-286) ; AMP1.2@4205.51,-380 AMP1.2@4191.76,-380 ; R97.2@4207.44,-215 4206.69,-215.75 R96.2@4120,-215.75 4110,-225.75 v1(4110,-286) ; C29.2@4338.98,-575 4300.51,-575 AMP1.4@4205.51,-480 4191.76,-480 4151.2,-439.45 4151.2,-420.55 AMP1.2@4191.76,-380 ; 152,-957.48 220.52,-957.48 ; 152,-957.48 188,-921.48 188,-584 ; 188,-584 225,-547 312,-547 323,-536 323,-81 344,-60 1016,-60 1060,-104 REG2.9@1060,-460 ; 220.52,-957.48 614,-564 ; 614,-564 614,-705 632,-723 SD1.1@650,-723 ; REG2.9@1060,-460 v1(1060,-555) 1060,-594 1036.7,-617.3 1036.7,-791.1 1048,-802.4 1080.12,-802.4 1120,-802.4 1148.62,-831.02 1190,-831.02 ; REG2.9@1060,-460 1085,-435 REG2.3@1166.3,-435 1200,-435 1241.02,-393.98 C6.2@1280,-393.98 1310,-363.98 HDR3.16@1310,-220 ; 1765,-1396 1842,-1473 1987,-1473 1996,-1464 1996,-1450 ; 1765,-1396 1765,-1473 1858,-1566 2168,-1566 2185,-1549 ; 1765,-1396 1765,-1331 ; 1985,-1305.3 1985,-1344.7 1996,-1355.7 1996,-1450 ; 2185,-1549 2185,-1608 2229.56,-1652.56 R5.1@2365,-1652.56 2401,-1652.56 ; 2185,-1549 C8.2@2185,-1375.43 2210,-1375.43 2240,-1345.43 ; 2401,-1652.56 2401,-1512 2451.98,-1461.02 2480,-1461.02 ; C25.2@2440,-1350 2440,-1421.02 2480,-1461.02 ; 2480,-1461.02 C16.2@2520,-1461.02 2535,-1461.02 2535,-1548 2584,-1597 2611,-1597 2645,-1563 2645,-1461.02 C15.2@2650,-1461.02 2736.98,-1461.02 2790,-1408 ; 3250,-445 3364,-331 3718,-331 R33.2@3720,-329 ; 3683,-770 3683,-844 3736,-897 3853,-897 3910,-840 ; R33.2@3720,-329 3793.57,-329 ; 3910,-840 4110,-640 4110,-298.24 ; 4110,-298.24 v1(4110,-286) ; 4110,-298.24 AMP1.2@4191.76,-380
  Top Layer w50: v4(3622.05,-1614.17) 3910,-1326.22 4020,-1216.22 SPK1.2@4020,-829.45
  Bottom Layer w10: v1(188,-491) 214,-465 Q12.3@250.63,-465 252.79,-465 277.57,-440.22 292.22,-440.22 R60.2@335,-397.44 ; v1(240.63,-865.48) Q30.3@240.63,-695 308.19,-627.44 R74.2@325,-627.44 ; v4(421.26,-1614.17) 495.83,-1614.17 718,-1392 888,-1392 Q6.3@915,-1365 ; v4(421.26,-157.48) 1047.48,-157.48 HDR3.20@1110,-220 ; 715,-1185 625,-1185 590,-1150 590,-1025 VAR1.1@720,-895 805,-980 1305.56,-980 1355,-930.56 1355,-841.26 Q38.3@1343.74,-830 ; 723,-1392 715,-1384 715,-1159.37 Q52.3@695.32,-1139.69 762.56,-1072.44 R94.1@780,-1072.44 ; Q42.3@900.63,-880 900.63,-860.33 930,-830.96 955.96,-830.96 v1(975,-850) 975,-869.37 Q40.3@985.63,-880 ; Q6.3@915.63,-1365 978.19,-1302.44 R30.1@1000,-1302.44 ; v1(1060,-555) 1265.63,-555 Q21.3@1355.63,-465 ; v1(1535,-745) 1565,-775 v1(1565,-875) ; v1@1565,-870 1695,-870 1821.28,-996.28 1821.28,-1062.74 1827.73,-1069.19 1872.27,-1069.19 1886.13,-1055.34 1886.13,-1021.66 1892.57,-1015.22 1917.43,-1015.22 1942.21,-1040 Q26.3@1944.37,-1040 1944,-1040.37 1944,-1099 1956,-1111 1999.63,-1111 Q23.3@2000.63,-1110 ; v1(1688,-679) 1688,-417 1769,-336 ; v1(1785,-755) 1796.28,-743.72 1952.75,-743.72 1960,-736.46 1960,-689.37 ; v1(1799,-452) 1769,-422 1769,-336 ; v1(1905,-450) 1920.63,-450 Q53.3@1930.63,-440 1985.63,-385 2010,-385 2021,-396 2021,-439.63 Q51.3@2020.63,-440 ; HDR3.4@1910,-220 1910,-187 1869,-146 1869,-100 1848,-79 ; Q8.3@1930.63,-660 1960,-689.37 ; Q17.3@1935.63,-875 1935,-875.63 1935,-915 ; Q35.3@1945.93,-1345 1945.93,-1329.07 v1(1965,-1310) 1990,-1285 2025,-1285 2036,-1296 2036,-1344.63 Q32.3@2035.63,-1345 ; Q5.3@2030.63,-660 2013.65,-660 1988.87,-684.78 1964.59,-684.78 1960,-689.37 ; v1(2105,-790) 2099.49,-790 2025.63,-863.86 Q14.3@2025.63,-875 2015.79,-875 1991.01,-899.78 1950.22,-899.78 1935,-915 ; v1(2236.32,-581.32) 2236.32,-573.68 2269,-541 2309,-541 2355,-587 ; v1(2260,-352.44) 2257.44,-355 2257.44,-292.56 v1(2260,-290) ; Q20.3@2329.37,-1060 2333.37,-1056 2410,-1056 v1(2412,-1054) 2506,-1054 2520,-1040 v1(2520,-1015) ; Q29.3@2354.37,-1290 2354.37,-1349.37 v1(2405,-1400) ; Q49.3@2364.37,-375 2364.37,-339.37 ; v1(2400,-1000) 2350,-1000 2350,-961 ; v1(2407.91,-1227.15) 2415,-1220.06 2415,-1155.21 v1(2471.6,-1098.62) ; R15.2@2415,-637.44 2417.56,-640 v1(2450,-640) ; R15.2@2415,-630 2385,-630 2375,-620 Q2.3@2369.37,-620 2355,-605.63 2355,-587 ; v1@2450,-645 2450,-840 2365,-840 2385,-860 2385,-926 2350,-961 ; HDR2.16@2775.04,-1600 HDR2.13@2853.74,-1678.74 ; Q48.3@2795.63,-660 2795,-659.37 2795,-645 2845,-595 2855,-595 2880,-620 Q46.3@2880,-660 ; HDR2.13@2853.78,-1678.74 2853.78,-1677.96 2931.74,-1600 HDR2.12@2932.52,-1600 2973.52,-1559 3049,-1559 HDR2.8@3090,-1600 HDR2.6@3168.74,-1600 3227.74,-1541 3548.87,-1541 v4@3607.87,-1600 ; v1(2958,-569) 3160,-569 3189.37,-598.37 3189.37,-626 3289,-626 3305,-642 3341,-642 3475,-508 3475,-430 3451,-406 3434.37,-406 3434.37,-323.63 3472,-286 v1(3963,-286) v1(4110,-286) 4130,-306 4130,-375 4169,-414 4169,-586 4135,-620 Q19.3@3954.37,-620 ; HDR2.9@3011.26,-1678.74 HDR2.5@3168.74,-1678.74 ; Q16.3@3015.63,-440 3061.63,-394 3093.7,-394 3120.63,-420.93 Q13.3@3120.63,-440 3115.63,-445 v1(3100,-445) ; v1(3042,-1094) 3188,-1240 ; v1(3155,-1255) 3170,-1240 3188,-1240 ; HDR2.3@3247.48,-1678.74 HDR2.2@3326.22,-1600 v4@3607.87,-1600 ; Q41.3@3290.63,-1110 3265,-1135.63 3265,-1190 3280,-1205 3324,-1205 v1(3325,-1206) 3291,-1240 ; v1(3324,-744) 3510,-744 ; v1(3370,-1070) 3380,-1080 3380,-1109.37 Q39.3@3380.63,-1110 ; Q34.3@3380.63,-885 3380.63,-867.78 3412.45,-835.96 3412.75,-835.96 3419.19,-829.52 3419.19,-829.22 3422.79,-825.62 3445.23,-825.62 v1(3468.13,-848.52) 3470.63,-851.02 Q31.3@3470.63,-885 ; Q45.3@3485.63,-1335 3486,-1334.63 3486,-1301.3 3473.7,-1289 3436.63,-1289 Q47.3@3390.63,-1335 3375,-1350.63 3375,-1424 ; Q25.3@3520.63,-640 3520.63,-655.63 3530,-665 ; Q22.3@3610.63,-640 3610.63,-664.37 3610,-665 ; v4(3622.05,-1614.17) v4@3607.87,-1600 ; v1(3680.66,-662.95) 3680.66,-663.47 3680.92,-663.73 3679.39,-663.73 3678.13,-665 3610,-665 ; Q37.3@3694.37,-1075 3699.37,-1080 3928,-1080 3972,-1036 ; Q7.3@3740.63,-440 3740.63,-425.43 3789.11,-376.95 3806.95,-376.95 3835,-405 3835,-430.63 Q4.3@3825.63,-440 ; Q43.3@3809.37,-1300 3824,-1300 3844,-1320 3844,-1418 ; 1769,-336 1769,-88 1778,-79 1848,-79 ; 1848,-79 1928,-79 1951,-102 1951,-252 1989,-290 v1(2260,-290) ; 1935,-915 1935,-961.46 1961.54,-988 2145.63,-988 2146.63,-989 2181,-989 v1(2192,-1000) 2311,-1000 2350,-961 ; v1(2260,-290) 2335,-290 2350,-305 2350,-325 2364.37,-339.37 ; 2355,-587 2355,-560 2400,-515 2400,-375 2364.37,-339.37 ; 3188,-1240 3291,-1240 ; 3291,-1240 3291,-1400 3315,-1424 3375,-1424 ; 3375,-1424 3394,-1424 3432,-1462 3800,-1462 3844,-1418 ; 3510,-744 3526,-760 3736,-760 3804.37,-828.37 Q28.3@3804.37,-835 3832.37,-807 3963,-807 3972,-816 3972,-1036 ; 3510,-744 3510,-685 3530,-665 ; 3530,-665 3610,-665 ; 3844,-1418 3972,-1290 3972,-1036
  other v1: 2883.78,-622.11
JTAG_SEL: R5.2 U1.35 | length 496.2
  Top Layer w10: U1.35@2295.75,-1156.02 2295.75,-1219 2299,-1222.25 2299,-1576 2320.44,-1597.44 R5.2@2365,-1597.44